# Altium PCB LCD-DTR-V1.00.PcbDoc
Units mm, origin at the board's own origin, x right, y up, seen from the top; angles counter-clockwise.
Board outline 85 x 56 mm, 2 copper layers (Top Layer, Bottom Layer), stack 1.671 mm thick; 41 components, 33 nets, 175 pads, 22 vias.
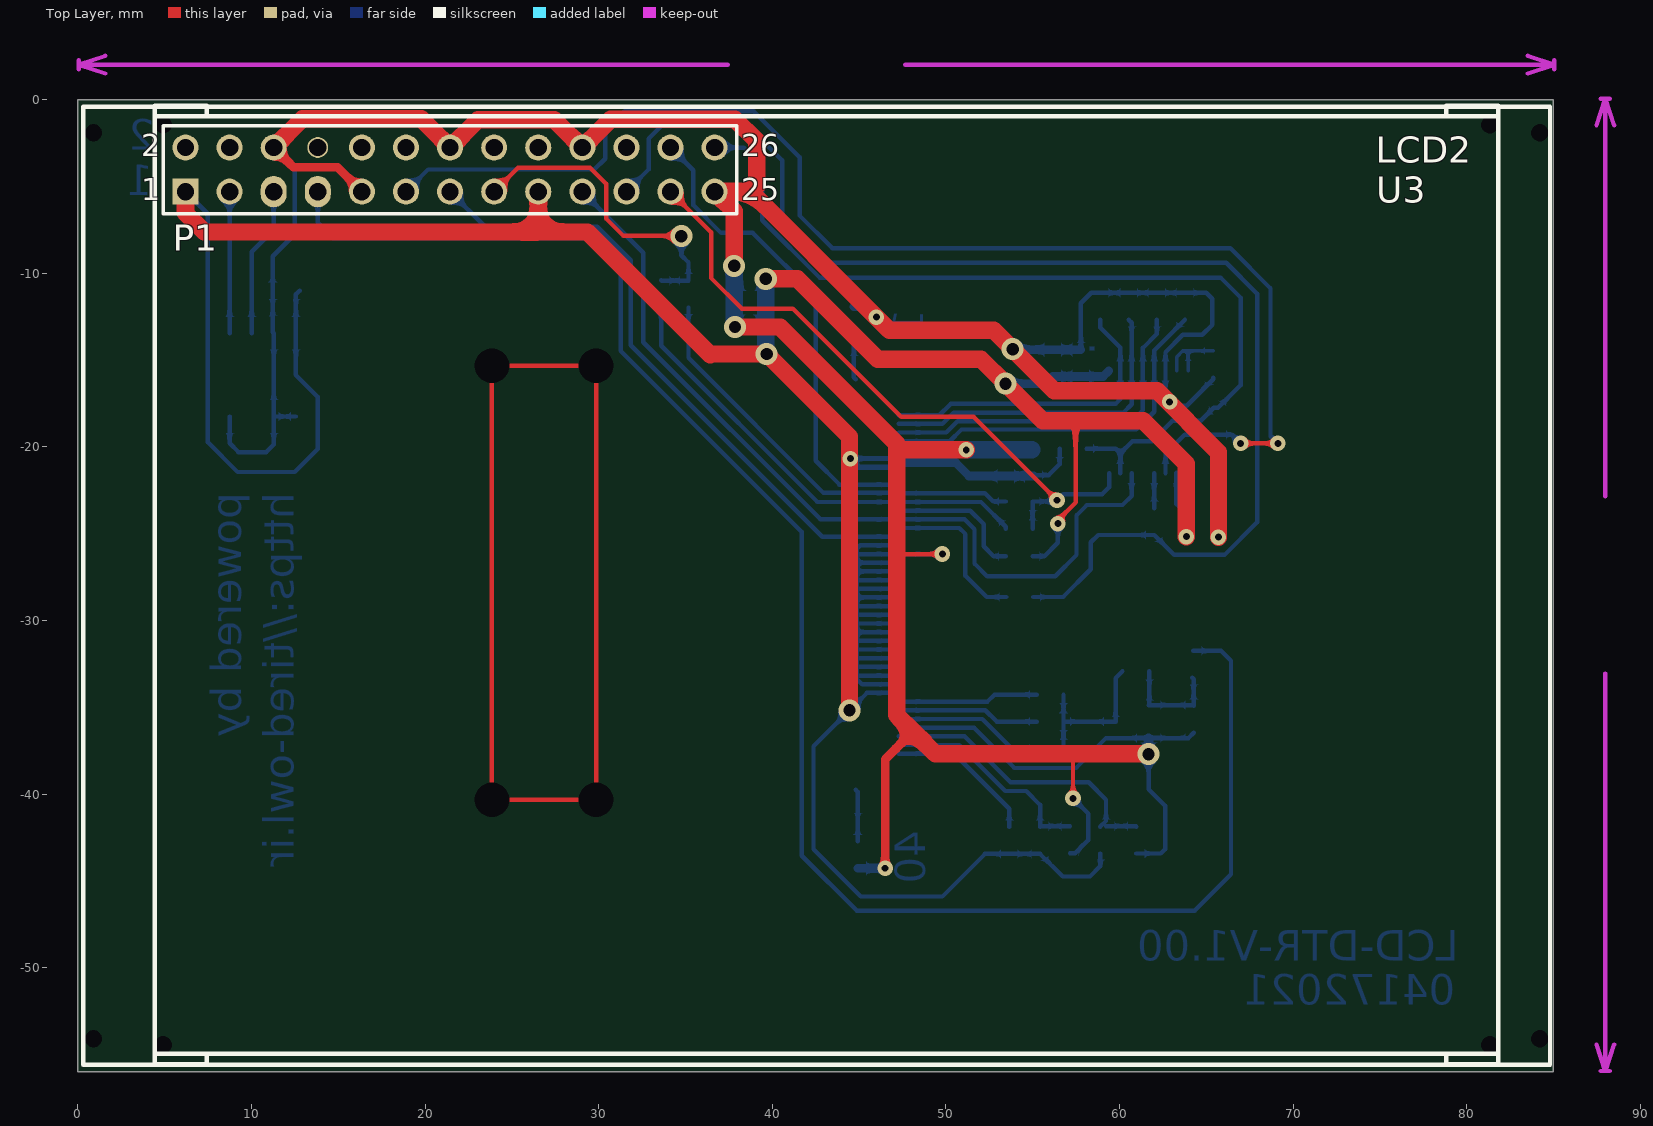
[diagram p0: Top Layer view]
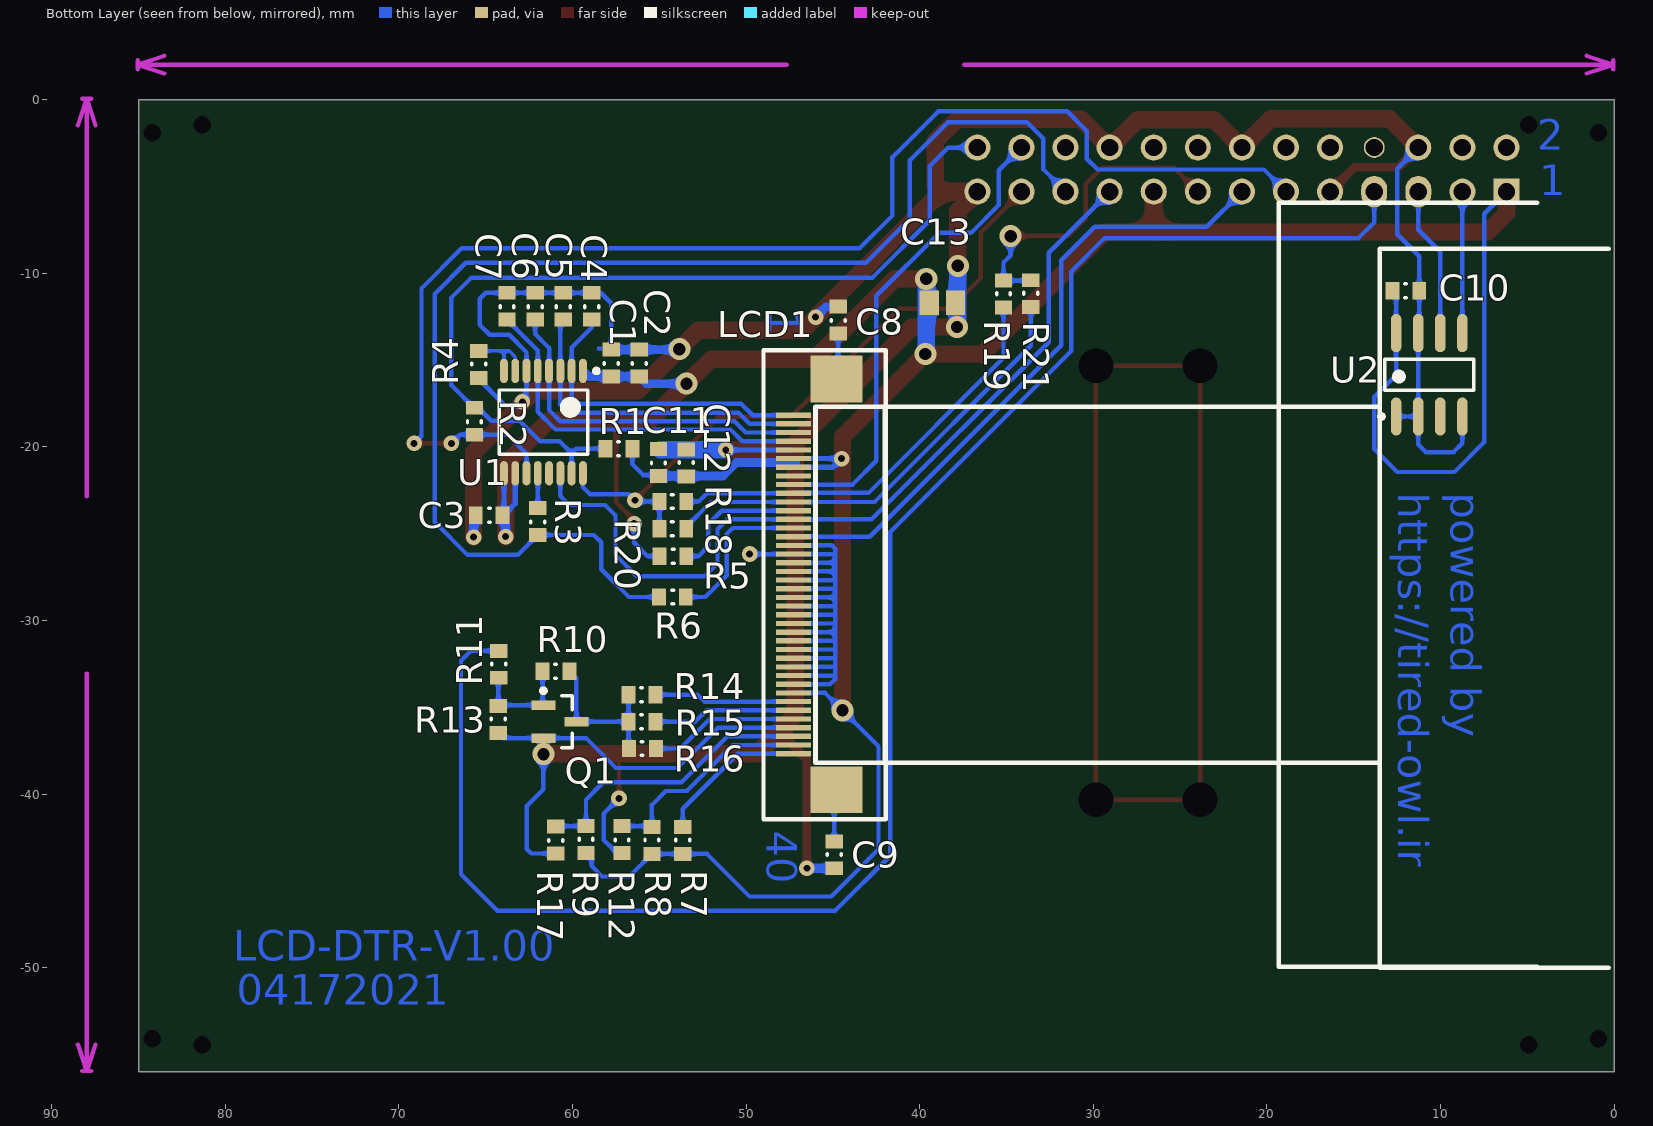
[diagram p1: Bottom Layer view, seen from below]
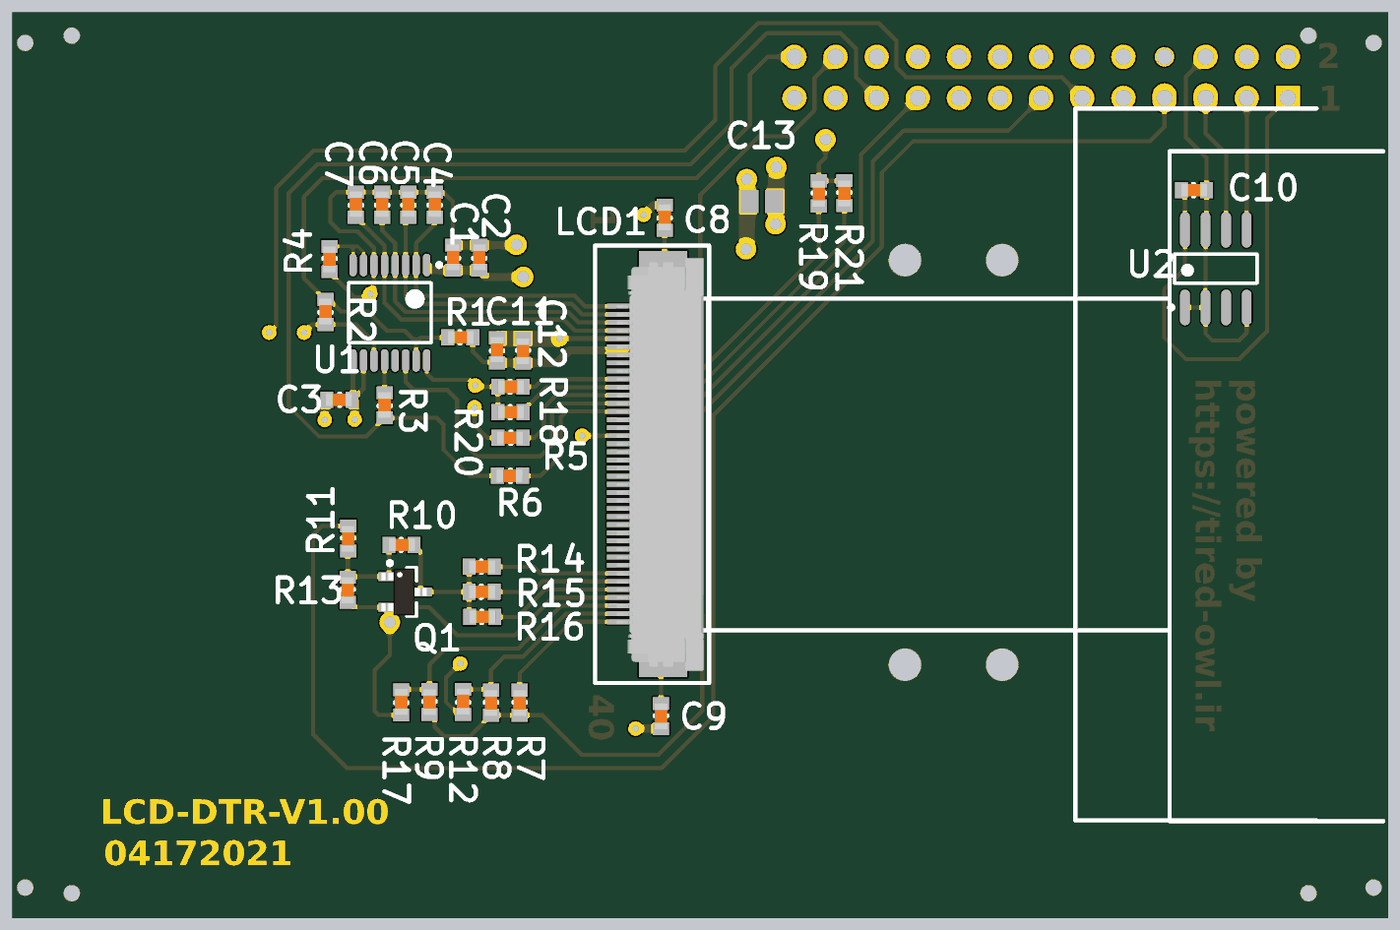
[diagram p2: 3D render of the assembled board from below, using the file's embedded part models]

## Layer stack, top to bottom
Top Solder: solder mask 0.0102, Solder Resist, Dk 3.5
Top Layer: signal copper 0.0356
Dielectric 1: dielectric 1.6, FR-4, Dk 4.8
Bottom Layer: signal copper 0.0356
Bottom Solder: solder mask 0.0102, Solder Resist, Dk 3.5

## Board outline
0,-56 0,0 85,0 85,-56

## Design rules (kind name [scope] priority, off if disabled: settings)
Clearance [All] p1: gap=0.2 ignorepadtopadclearanceinfootprint=FALSE except(0: Arc-Hole Track-Hole SMDPad-Hole THPad-Hole Via-Hole Fill-Hole Poly-Hole Region-Hole Text-Hole)
PolygonConnect [All] p1: connectstyle=Relief reliefconductorwidth=0.254 reliefentries=4 polygonreliefangle="90 Angle" airgapwidth=0.254
RoomDefinition Interface [InComponentClass('Interface')] p1: confinementstyle=ConfineOut formatcopy=TRUE lockcomponents=FALSE outline 92.925,-43.775 140.169,-43.775 140.169,-13.549 92.925,-13.549
RoutingVias [All] p1: holewidth=0.711 width=1.27 viastyle="Through Hole" minholewidth=0.711 minwidth=1.27 maxholewidth=0.711 maxwidth=1.27
SolderMaskExpansion [All] p1: expansion=0.102
Width [All] p1: maxlimit=4 minlimit=0.2 preferedwidth=0.254
30 further rules are at their usual default settings.

## Components (designator, comment, footprint, x,y, rotation, side; value= is the part's Value field where it differs from the comment)
C1 "Cap" 0603PKG 57.775,-15.175 r270 bottom
C2 "Cap" 0603PKG 56.15,-15.175 r270 bottom
C3 "Cap" 0603PKG 64.8,-23.95 r180 bottom
C4 "Cap" 0603PKG 58.9,-11.9 r270 bottom
C5 "Cap" 0603PKG 60.525,-11.9 r270 bottom
C6 "Cap" 0603PKG 62.15,-11.9 r270 bottom
C7 "Cap" 0603PKG 63.775,-11.9 r270 bottom
C8 "Cap" 0603PKG 44.7,-12.7 r270 bottom
C9 "Cap" 0603PKG 44.925,-43.5 r90 bottom
C10 "Cap" 0603PKG 12,-11 r0 bottom
C11 "Cap" 0603PKG 55.05,-20.9 r270 bottom
C12 "Cap" 0603PKG 53.45,-20.925 r90 bottom
C13 "Cap" C0805 38.7,-11.7 r0 bottom
LCD1 "ZJY320IT008" FPC-40pin 47.275,-18.175 r90 bottom locked
LCD2 "ZJY320IT008" ZJY320IT008 4.425,-0.95 r0 top locked
P1 "Rpi" HDR2X13 6.2,-5.3 r0 top locked (schematic designator P2)
Q1 "IRLML2803TRPBF" SOT23 60.725,-35.825 r180 bottom
R1 "Res1" 0603PKG 57.325,-20.1 r0 bottom
R2 "Res1" 0603PKG 65.65,-18.525 r270 bottom
R3 "Res1" 0603PKG 62,-24.3 r270 bottom
R4 "Res1" 0603PKG 65.4,-15.25 r90 bottom
R5 "Res1" 0603PKG 54.225,-26.3 r180 bottom
R6 "Res1" 0603PKG 54.25,-28.65 r180 bottom
R7 "Res1" 0603PKG 53.65,-42.675 r90 bottom
R8 "Res1" 0603PKG 55.425,-42.675 r90 bottom
R9 "Res1" 0603PKG 59.225,-42.625 r90 bottom
R10 "Res1" 0603PKG 60.95,-32.925 r0 bottom
R11 "Res1" 0603PKG 64.25,-32.525 r90 bottom
R12 "Res1" 0603PKG 57.15,-42.625 r270 bottom
R13 "Res1" 0603PKG 64.275,-35.7 r90 bottom
R14 "Res1" 0603PKG 56,-34.275 r0 bottom
R15 "Res1" 0603PKG 56,-35.825 r0 bottom
R16 "Res1" 0603PKG 55.975,-37.375 r0 bottom
R17 "Res1" 0603PKG 60.975,-42.65 r270 bottom
R18 "Res1" 0603PKG 54.225,-23.15 r0 bottom
R19 "Res1" 0603PKG 35.175,-11.2 r90 bottom
R20 "Res1" 0603PKG 54.225,-24.725 r0 bottom
R21 "Res1" 0603PKG 33.6,-11.175 r90 bottom
U1 "ADS7843" TSSOP16 61.675,-18.575 r270 bottom
U2 "AT24C512C-SSHD-T" 8S1_N 10.65,-15.85 r90 bottom
U3 "ZJY350IT006" ZJY350IT006 0.3,-55.6 r0 top

## Footprints (in the part's own frame and the unit in brackets; to place one, negate y for a bottom-side part, rotate by r counter-clockwise, add the part's x,y. Pads: shape width x height; smd on the part's side, far side on the other; paste and mask are expansions set on the pad)
8S1_N [mm] "SOIC, 8-Leads, Body 4.9x3.9mm, Pitch 1.27mm, IPC Medium Density"
  oval 2.2x0.6 smd: 1(-2.4,1.905) 2(-2.4,0.635) 3(-2.4,-0.635) 4(-2.4,-1.905) 5(2.4,-1.905) 6(2.4,-0.635) 7(2.4,0.635) 8(2.4,1.905)
  silkscreen extent -2.52,-2.55 0.9,2.88, body extent -1.99,-2.53 1.99,2.53, height 1.75
0603PKG [mm] "Chip Resistor, 2-Leads, Body 1.60x0.78mm, IPC Medium Density"
  rect 0.8x1 smd: 1(-0.775,0) 2(0.775,0)
  silkscreen extent -0.02,-0.4 0.08,0.4, body extent -0.83,-0.4 0.77,0.4, height 0.5
C0805 [mm] "Chip Capacitor, Body 2.0x1.3mm, IPC High Density"
  rect 1.1x1.4 smd: 1(-0.75,0) 2(0.75,0)
  body extent -1.1,-0.72 1.1,0.72, height 1.4
FPC-40pin [mm] "FPC 40 pin top contact 0.5mm pitch"
  rect 0.3x2 smd: 1(0,0) 2(-0.5,0) 3(-1,0) 4(-1.5,0) 5(-2,0) 6(-2.5,0) 7(-3,0) 8(-3.5,0) 9(-4,0) 10(-4.5,0) 11(-5,0) 12(-5.5,0) 13(-6,0) 14(-6.5,0) 15(-7,0) 16(-7.5,0) 17(-8,0) 18(-8.5,0) 19(-9,0) 20(-9.5,0) 21(-10,0) 22(-10.5,0) 23(-11,0) 24(-11.5,0) 25(-12,0) 26(-12.5,0) 27(-13,0) 28(-13.5,0) 29(-14,0) 30(-14.5,0) 31(-15,0) 32(-15.5,0) 33(-16,0) 34(-16.5,0) 35(-17,0) 36(-17.5,0) 37(-18,0) 38(-18.5,0) 39(-19,0) 40(-19.5,0)
  rect 2.7x3 smd: 41(2.075,-2.475) 42(-21.575,-2.475)
  silkscreen extent -23.28,-5.33 3.75,1.73, body extent -22.53,-4.97 2.97,0.42, height 2.02
HDR2X13 [mm] "Connector; Header; 13x2 Position"
  rect 1.5x1.5 hole 1: 1(0,0)
  round 1.5 hole 1: 2(0,2.54) 3(2.54,0) 4(2.54,2.54) 6(5.08,2.54) 9(10.16,0) 10(10.16,2.54) 11(12.7,0) 12(12.7,2.54) 13(15.24,0) 14(15.24,2.54) 15(17.78,0) 16(17.78,2.54) 17(20.32,0) 18(20.32,2.54) 19(22.86,0) 20(22.86,2.54) 21(25.4,0) 22(25.4,2.54) 23(27.94,0) 24(27.94,2.54) 25(30.48,0) 26(30.48,2.54)
  oval 1.5x1.8 hole 1: 5(5.08,0) 7(7.62,0)
  round 1.2 hole 1: 8(7.62,2.54)
  silkscreen extent -1.27,-1.27 31.75,3.81
SOT23 [mm] "SOT23, 3-Leads, Body 2.90x2.30mm, Pitch 0.95mm, IPC Medium Density"
  rect 1.4x0.55 smd: 1(-0.95,0.95) 2(-0.95,-0.95) 3(0.95,0)
  silkscreen extent -1.08,-1.5 0.7,1.9, body extent -1.47,-1.45 1.33,1.45, height 1.3
TSSOP16 [mm]
  oval 1.4x0.45 smd: 1(-2.95,2.275) 2(-2.95,1.625) 3(-2.95,0.975) 4(-2.95,0.325) 5(-2.95,-0.325) 6(-2.95,-0.975) 7(-2.95,-1.625) 8(-2.95,-2.275) 9(2.95,-2.275) 10(2.95,-1.625) 11(2.95,-0.975) 12(2.95,-0.325) 13(2.95,0.325) 14(2.95,0.975) 15(2.95,1.625) 16(2.95,2.275)
  silkscreen extent -3.07,-2.55 1.85,3.17, body extent -2.25,-2.55 2.25,2.55, height 1.1
ZJY320IT008 [mm] "LCD Module: Graphic 240RGB*320Dot-matrix"
  round 0 hole 1: 0(0.5,-53.5) 0(0.5,-0.5) 0(76.9,-53.5) 0(76.9,-0.5)
  silkscreen extent 0,-54.6 77.4,0.6
ZJY350IT006 [mm] "Graphic 320RGB*480 Dot-matrix"
  round 0 hole 1: 0(0.6,1.5) 0(0.6,53.7) 0(83.9,1.5) 0(83.9,53.7)
  silkscreen extent 0,0 84.5,55.2

## Part data
C1 C2 C3 C4 C5 C6 C7 C8 C9 C10 C11 C12 C13: "Capacitor"
LCD1: library part ZJY320IT008-LIB
P1: library part "Header 13X2", "Header, 13-Pin, Dual row"
Q1: library part NMOS-2, "N-Channel Power MOSFET"
R1 R2 R3 R4 R5 R6 R7 R8 R9 R10 R11 R12 R13 R14 R15 R16 R17 R18 R19 R20 R21: "Resistor"
U2: library part AT24C01BN-SP25-B, "1Kbit (128 x 8), 2-wire Bus Automotive Serial EEPROM with Write Protect, 2.5V, 8-Pin SOIC, Bulk"

## Free pads (board coordinates)
  round 0 hole 2: 3(23.85,-40.325) 3(23.85,-15.325) 3(29.85,-40.325) 3(29.85,-15.325)

## Via types
v1: diameter 0.9, hole 0.4, Top Layer to Bottom Layer, tented top, 13 vias
v2: diameter 1.27, hole 0.711, Top Layer to Bottom Layer, tented top, 9 vias

## Nets (pads, with @x,y where several pads share a name; then routed paths per layer and width w, separated by ;. In a path a pad name is that pad's centre, name@x,y a point inside that pad or via, vN(x,y) a via of type N, cw(c..) or ccw(c..) an arc to the next point about the centre after c; other vN are vias at no path point)
CLK: LCD1.10 R18.1 R19.1 | length 24.6
  Bottom Layer w0.254: R19.1 35.175,-14.875 42.952,-22.652 47.252,-22.652 LCD1.10 52.25,-22.675 52.725,-23.15 R18.1
DCX: LCD1.11 R20.1 R21.1 | length 26.5
  Bottom Layer w0.254: R21.1 33.6,-14.175 42.6,-23.175 LCD1.11 52.025,-23.175 53.45,-24.6 R20.1
GND: C1.1 C2.1 C3.1 C4.1 C5.1 C6.1 C7.1 C8.1 C9.1 C10.1 C11.1 C12.2 C13.1 LCD1.5 LCD1.16 LCD1.17 LCD1.18 LCD1.19 LCD1.20 LCD1.21 LCD1.22 LCD1.23 LCD1.24 LCD1.25 LCD1.26 LCD1.27 LCD1.28 LCD1.29 LCD1.30 LCD1.31 LCD1.32 LCD1.37 P1.6 P1.9 P1.14 P1.20 P1.25 Q1.2 R4.1 R12.2 R13.1 R17.2 U1.6 U2.1 U2.2 U2.4 U2.7 | length 299.2
  Top Layer w0.254: 47.175,-26.1 47.25,-26.175 v1(49.8,-26.175) ; 47.175,-20.225 47.225,-20.175 ; v1(57.325,-40.25) 57.325,-37.7 57.35,-37.675 ; v2@61.65,-37.7 v2(61.675,-37.7)
  Top Layer w0.5: P1.6 12.42,-3.9 14.96,-3.9 P1.9 ; v1(46.5,-44.275) 46.5,-38 48.112,-36.387
  Top Layer w1: P1.6 12.94,-1.1 19.78,-1.1 P1.14 23.05,-1.15 27.45,-1.15 P1.20 30.695,-1.125 37.85,-1.125 39.1,-2.375 39.1,-4.975 38.775,-5.3 ; v2(37.8,-9.575) 37.8,-6.42 P1.25 38.775,-5.3 ; v2(37.85,-13.1) 40.45,-13.1 47.175,-19.825 47.175,-20.225 47.175,-26.1 47.175,-35.45 48.112,-36.387 49.4,-37.675 57.35,-37.675 v2@61.625,-37.675 ; 47.225,-20.175 v1(51.175,-20.175) ; v1(65.7,-25.2) 65.7,-20.3 62.175,-16.775 56.25,-16.775 v2(53.85,-14.375) 52.75,-13.275 46.75,-13.275 v1(46,-12.525) 38.775,-5.3
  Bottom Layer w0.254: U2.4 8.745,-19.795 9.25,-20.3 10.85,-20.3 11.285,-19.865 U2.2 ; P1.6 12.495,-3.975 12.495,-7.755 11.225,-9.025 C10.1 11.225,-13.39 U2.7 U2.2 ; U2.1 U2.2 ; 44.875,-33.225 44.925,-33.175 LCD1.31 LCD1.31@47.425,-33.175 ; LCD1.37 51.625,-36.175 53.95,-38.5 57.5,-38.5 59.225,-36.775 Q1.2 63.975,-36.775 R13.1 ; LCD1.17 v1(49.8,-26.175) v1@49.825,-26.15 ; LCD1.32@47.425,-33.675 LCD1.32 45.175,-33.675 44.875,-33.375 44.875,-32.75 ; LCD1.30@47.425,-32.675 44.95,-32.675 44.875,-32.75 ; LCD1.29@47.425,-32.175 44.9,-32.175 44.875,-32.2 ; LCD1.28@47.425,-31.675 44.95,-31.675 44.875,-31.6 ; LCD1.27@47.425,-31.175 44.95,-31.175 44.875,-31.1 ; LCD1.26@47.425,-30.675 44.875,-30.675 ; LCD1.25@47.425,-30.175 45,-30.175 44.875,-30.3 ; LCD1.24@47.425,-29.675 44.95,-29.675 44.875,-29.75 ; LCD1.23@47.425,-29.175 44.9,-29.175 44.875,-29.15 ; LCD1.22@47.425,-28.675 44.875,-28.675 ; LCD1.21@47.425,-28.175 44.925,-28.175 44.875,-28.225 ; LCD1.20@47.425,-27.675 44.925,-27.675 44.875,-27.725 ; LCD1.19@47.425,-27.175 44.875,-27.175 ; LCD1.18@47.425,-26.675 44.875,-26.675 ; LCD1.17@47.425,-26.175 44.925,-26.175 44.875,-26.225 ; LCD1.16@47.425,-25.675 45.075,-25.675 44.875,-25.875 44.875,-26.225 ; C12.2@53.375,-20.175 C12.2@53.475,-20.075 ; C2.1 C1.1 57.775,-11.725 58.375,-11.125 C4.1 C5.1 C6.1 C7.1 65,-11.125 65.35,-11.475 65.35,-12.975 64.775,-13.55 63.65,-13.55 62.65,-14.55 U1.6 62.65,-17.175 v1(62.888,-17.413) 63.1,-17.625 63.875,-17.625 65.4,-16.1 R4.1 ; R12.2 57.45,-43.4 58.2,-42.65 58.2,-41.125 v1(57.325,-40.25) ; R17.2 62.375,-43.425 62.625,-43.175 62.625,-40.675 61.675,-39.725 v2(61.675,-37.7) ; 44.875,-32.75 44.875,-32.2 ; 44.875,-32.2 44.875,-31.6 ; 44.875,-31.6 44.875,-31.1 ; 44.875,-31.1 44.875,-30.675 ; 44.875,-30.675 44.875,-30.3 ; 44.875,-30.3 44.875,-29.75 ; 44.875,-29.75 44.875,-29.15 ; 44.875,-29.15 44.875,-28.675 ; 44.875,-28.675 44.875,-28.225 ; 44.875,-28.225 44.875,-27.725 ; 44.875,-27.725 44.875,-27.175 ; 44.875,-27.175 44.875,-26.675 ; 44.875,-26.675 44.875,-26.225
  Bottom Layer w0.3: LCD1.5 v1(51.175,-20.175)
  Bottom Layer w0.5: C8.1 45.4,-11.925 v1(46,-12.525) ; C9.1 v1(46.5,-44.275) ; v2(53.85,-14.375) 53.875,-14.4 C1.1 ; v2(61.675,-37.7) Q1.2 ; C3.1@65.45,-23.9 65.7,-24.15 v1(65.7,-25.2)
  Bottom Layer w1: v2(37.8,-9.575) 37.8,-13.05 v2(37.85,-13.1) ; v1(51.175,-20.175) 53.375,-20.175 C11.1@54.95,-20.175
I2C_SCL: P1.5 U2.6 | length 8.7
  Bottom Layer w0.254: U2.6 10.015,-8.76 11.28,-7.495 P1.5
I2C_SDA: P1.3 U2.5 | length 8.2
  Bottom Layer w0.254: P1.3 8.74,-10.55 8.745,-10.555 U2.5
L\C\D\_\C\S\: LCD1.9 P1.24 | length 27.9
  Bottom Layer w0.254: P1.24 35.45,-4.07 35.45,-6.075 37.05,-7.675 38.875,-7.675 42.5,-11.3 42.5,-20.808 43.867,-22.175 LCD1.9
L\C\D\_\R\S\T: LCD1.15 P1.13 | length 37.1
  Bottom Layer w0.254: P1.13@21.325,-5.415 P1.13 23.465,-7.325 29.925,-7.325 31.85,-9.25 31.85,-14.15 42.875,-25.175 LCD1.15
LCD_RS: P1.15 R19.2 R21.2 | length 18.5
  Top Layer w0.254: P1.15 25.355,-3.925 29.5,-3.925 30.425,-4.85 30.425,-6.85 31.425,-7.85 34.775,-7.85 v2(34.763,-7.862)
  Bottom Layer w0.254: R21.2 33.625,-10.425 R19.2 35.175,-9.375 34.763,-8.962 v2(34.763,-7.862)
NetC8_2: C8.2 LCD1.41 | length 2.7
  Bottom Layer w0.254: C8.2 44.7,-16 LCD1.41
NetC9_2: C9.2 LCD1.42 | length 3
  Bottom Layer w0.254: LCD1.42 44.925,-39.875 C9.2
NetLCD1_12: LCD1.12 R5.2 | length 8
  Bottom Layer w0.254: LCD1.12 51.4,-23.675 52.175,-24.45 52.175,-25.725 52.75,-26.3 R5.2
NetLCD1_14: LCD1.14 R6.2 | length 9.3
  Bottom Layer w0.254: LCD1.14 50.775,-24.675 51.125,-25.025 51.125,-27.425 52.35,-28.65 R6.2
NetLCD1_34: LCD1.34 R14.1 | length 8.1
  Bottom Layer w0.254: LCD1.34 52.4,-34.675 52.8,-34.275 R14.1
NetLCD1_35: LCD1.35 R15.1 | length 8.2
  Bottom Layer w0.254: LCD1.35 52.275,-35.175 52.925,-35.825 R15.1
NetLCD1_36: LCD1.36 R16.1 | length 8.6
  Bottom Layer w0.254: LCD1.36 52.1,-35.675 53.8,-37.375 R16.1
NetLCD1_38: LCD1.38 R9.2 R17.1 | length 16.9
  Bottom Layer w0.254: LCD1.38 51.075,-36.675 53.725,-39.325 58.225,-39.325 59.225,-40.325 59.225,-41.55 R9.2@58.9,-41.875 ; R9.2 60.95,-41.85 R17.1
NetLCD1_39: LCD1.39 R8.2 R12.1 | length 12.6
  Bottom Layer w0.254: LCD1.39 50.775,-37.175 53.425,-39.825 54.625,-39.825 55.425,-40.625 R8.2 55.475,-41.85 R12.1
NetLCD1_40: LCD1.40 R7.2 | length 8.7
  Bottom Layer w0.254: LCD1.40 50.475,-37.675 53.65,-40.85 R7.2
NetQ1_1: Q1.1 R10.2 R11.1 R13.2 | length 6.2
  Bottom Layer w0.254: R10.2 61.725,-34.825 Q1.1 64.225,-34.875 R13.2 64.275,-33.375 R11.1@64.2,-33.3
NetQ1_3: Q1.3 R10.1 R14.2 R15.2 R16.2 | length 9.2
  Bottom Layer w0.254: R16.2 56.775,-37.35 R15.2 ; R14.2 R15.2 ; R10.1 59.775,-33.325 Q1.3 R15.2
NetR3_1: R3.1 U1.12 | length 2
  Bottom Layer w0.254: R3.1 61.993,-23.518 62,-23.51 U1.12
NetR4_2: R4.2 U1.7 U1.8 | length 4.2
  Bottom Layer w0.2: U1.7 63.3,-14.825 63.65,-14.475 63.95,-14.475 ; U1.8 63.95,-14.475 ; R4.2 63.95,-14.475
PWM: P1.7 R11.2 | length 100
  Bottom Layer w0.254: P1.7 13.82,-7.07 14.725,-7.975 29.35,-7.975 31.275,-9.9 31.275,-14.475 41.7,-24.9 41.7,-43.55 44.875,-46.725 64.325,-46.725 66.425,-44.625 66.425,-32.325 65.85,-31.75 R11.2
SPI_MISO: P1.21 R3.2 R6.1 | length 74.8
  Bottom Layer w0.254: P1.21 32.875,-4.025 32.875,-2.25 33.825,-1.3 38.375,-1.3 40.575,-3.5 40.575,-6.875 43.1,-9.4 66.15,-9.4 67.925,-11.175 67.925,-24.35 66.05,-26.225 63.15,-26.225 R3.2 59.65,-25.075 58.775,-25.075 58.35,-25.5 58.35,-27.05 56.75,-28.65 R6.1
SPI_MOSI: LCD1.13 P1.19 U1.14 | length 49.6
  Bottom Layer w0.254: P1.19@29.025,-5.335 P1.19 32.575,-8.815 32.575,-13.975 42.775,-24.175 LCD1.13 51.075,-24.175 51.65,-24.75 51.65,-26.725 52.375,-27.45 56.3,-27.45 57.525,-26.225 57.525,-23.95 58.125,-23.35 60.175,-23.35 60.7,-22.825 U1.14
SPI_SCK: P1.23 R18.2 R20.2 U1.16 | length 38.7
  Top Layer w0.254: P1.23 36.475,-7.635 36.475,-10.275 38.237,-12.037 41.187,-12.037 47.425,-18.275 51.6,-18.275 v1(56.4,-23.075)
  Bottom Layer w0.254: P1.23@34.14,-5.69 P1.23 ; R20.2 R18.2 56.325,-23.15 v1(56.4,-23.075) 56.75,-22.725 59,-22.725 59.4,-22.325 U1.16
T\S\_\C\S\: P1.26 R1.2 R2.1 U1.15 | length 52.5
  Bottom Layer w0.254: P1.26 38.36,-2.76 39.425,-3.825 39.425,-6.95 42.725,-10.25 65.825,-10.25 66.975,-11.4 66.975,-16.45 65.675,-17.75 65.425,-17.75 64.675,-18.5 63.05,-18.5 61.875,-19.675 60.75,-19.675 60.05,-20.375 ; R1.2 59.775,-20.1 60.05,-20.375 ; U1.15 60.05,-20.375
TS_IRQ: P1.11 R2.2 U1.11 | length 76.2
  Top Layer w0.254: v1(66.975,-19.8) v1(69.125,-19.8)
  Bottom Layer w0.254: P1.11 20.175,-4.025 29.75,-4.025 30.375,-3.4 30.375,-1.8 31.5,-0.675 38.925,-0.675 41.575,-3.325 41.575,-6.675 43.45,-8.55 66.375,-8.55 68.7,-10.875 68.7,-19.375 v1(69.125,-19.8) ; U1.11 62.65,-20.4 63.75,-19.3 65.425,-19.3 66.475,-19.3 v1(66.975,-19.8)
VCC_3V3: C1.2 C2.2 C3.2 C10.2 C11.2 C12.1 C13.2 LCD1.6 LCD1.7 LCD1.33 P1.1 P1.17 R1.1 R5.1 R7.1 R8.1 R9.1 U1.1 U1.9 U1.10 U2.8 | length 203.1
  Top Layer w0.254: v1(56.45,-24.425) 56.45,-24.225 57.475,-23.2 57.475,-18.5 ; v1@63.775,-25.175 v1(63.85,-25.175)
  Top Layer w1: P1.1 6.2,-6.55 7.27,-7.62 26.52,-7.62 ; P1.17 26.52,-7.62 ; v2(39.625,-10.325) 41.45,-10.325 46.075,-14.95 52.025,-14.95 v2(53.437,-16.363) 55.575,-18.5 56.35,-18.5 61.375,-18.5 63.85,-20.975 v1(63.85,-25.175) ; v2(44.45,-35.175) 44.45,-19.425 v2(39.675,-14.65) 36.475,-14.65 36.425,-14.7 29.345,-7.62 26.52,-7.62
  Bottom Layer w0.254: P1.1 7.475,-6.575 7.475,-19.725 9.2,-21.45 12.5,-21.45 13.825,-20.125 13.825,-17.125 12.555,-15.855 U2.8 12.555,-11.22 C10.2 ; v2@44.5,-35.175 v2(44.45,-35.175) ; LCD1.33 45.45,-34.175 v2(44.45,-35.175) ; R5.1 55.675,-26.3 56.45,-25.525 v1(56.45,-24.425) ; C11.2@55.05,-21.625 55.925,-21.625 56.55,-21 R1.1 ; C2.2 C2.2@56.25,-15.85 ; R9.1@58.9,-43.425 58.9,-44.15 58.3,-44.75 56.725,-44.75 R8.1 R7.1 52.25,-43.45 49.8,-45.9 45.1,-45.9 42.375,-43.175 42.375,-37.25 v2(44.45,-35.175) ; v1(63.85,-25.175) v1@63.9,-25.225 ; C3.2@63.898,-23.873 C3.2@63.925,-23.9
  Bottom Layer w0.3: LCD1.7 45,-21.175 v1(44.5,-20.675) LCD1.6 ; U1.10 63.3,-23.275 63.898,-23.873 63.95,-23.82 U1.9
  Bottom Layer w0.5: 47.15,-20.875 47.175,-20.9 50.557,-20.9 51.332,-21.675 C11.2 ; v2(53.437,-16.363) 55.738,-16.363 C2.2 C1.2 59.05,-15.95 U1.1@59.375,-15.625 ; v1(63.85,-25.175) C3.2@63.85,-23.975
  Bottom Layer w1: v2@39.625,-14.375 v2(39.625,-10.325)
XL: C4.2 LCD1.1 U1.2 | length 18.2
  Bottom Layer w0.254: LCD1.1 49.625,-18.175 50.275,-17.525 59.775,-17.525 60.05,-17.25 U1.2 60.05,-14.275 58.9,-13.125 C4.2
XR: C6.2 LCD1.3 U1.4 | length 20.1
  Bottom Layer w0.254: LCD1.3 50.025,-19.175 50.675,-18.525 60.7,-18.525 61.35,-17.875 U1.4 61.35,-14.3 62.15,-13.5 C6.2
YD: C7.2 LCD1.4 U1.5 | length 21.5
  Bottom Layer w0.254: LCD1.4 50.225,-19.675 50.9,-19 60.975,-19 62,-17.975 U1.5 62,-14.45 C7.2
YU: C5.2 LCD1.2 U1.3 | length 18.9
  Bottom Layer w0.254: LCD1.2 49.8,-18.675 50.45,-18.025 60.225,-18.025 60.7,-17.55 U1.3 C5.2@60.7,-12.85 ; C5.2 C5.2@60.7,-12.85 ; C5.2@60.723,-12.873 C5.2@60.7,-12.85
pads on no net: LCD1.8 LCD2.0 P1.2 P1.4 P1.8 P1.10 P1.12 P1.16 P1.18 P1.22 U1.13 U2.3 U3.0
copper on no net: | length 62
  Top Layer w0.254: 23.85,-40.325 23.85,-15.325 29.85,-15.325 29.85,-40.325 23.85,-40.325

## Keep-outs
Keep-Out Layer:
  lines w0.254: 0.05,1.76 0.05,2.268 ; 1.574,1.506 0.05,2.014 ; 1.574,2.522 0.05,2.014 ; 37.446,2.014 0.05,2.014 ; 47.654,2.014 85.05,2.014 ; 83.526,1.506 85.05,2.014 ; 83.526,2.522 85.05,2.014 ; 85.05,1.76 85.05,2.268 ; 87.478,-54.426 87.986,-55.95 ; 87.478,-1.474 87.986,0.05 ; 87.732,-55.95 88.24,-55.95 ; 87.732,0.05 88.24,0.05 ; 87.986,-33.054 87.986,-55.95 ; 87.986,-22.846 87.986,0.05 ; 88.494,-54.426 87.986,-55.95 ; 88.494,-1.474 87.986,0.05
  text "85 (mm)" at 37.7,1.1 h1.52
  text "56 (mm)" at 88.9,-32.8 h1.52 r90

## Other copper
Bottom Layer:
  text "2" at 4.425,-3.45 h3
  text "1" at 4.325,-6.075 h3
  text "1" at 49.275,-12.075 h3 r90
  text "." at 59.15,-13.975 h3 r90
  text "powered by / https://tired-owl.ir" at 13,-22.65 h3 r90
  text "40" at 49.375,-42.125 h3 r90
  text "LCD-DTR-V1.00" at 79.55,-50.175 h3
  text "04172021" at 79.35,-52.725 h3

## Silkscreen, mask and mechanical layers (free items; w line width, h text height)
Bottom Solder:
  text "LCD-DTR-V1.00" at 79.55,-50.15 h3
  text "04172021" at 79.35,-52.7 h3
Mechanical 1:
  the board outline again, w0.254

## Text inside footprints (layer, text, board x,y; h text height)
P1: Top Overlay "2" at 3.66,-3.268 h1.27; Top Overlay "1" at 3.66,-5.808 h1.27; Top Overlay "25" at 38.204,-5.808 h1.27; Top Overlay "26" at 38.204,-3.268 h1.27